# Altium PCB msp430最小系统.PcbDoc (part 3 of 3)
Units mm, origin at the board's own origin, x right, y up, seen from the top; angles counter-clockwise.
Board outline 152.4 x 101.6 mm, 2 copper layers (Top Layer, Bottom Layer); 67 components, 101 nets, 330 pads, 20 vias.
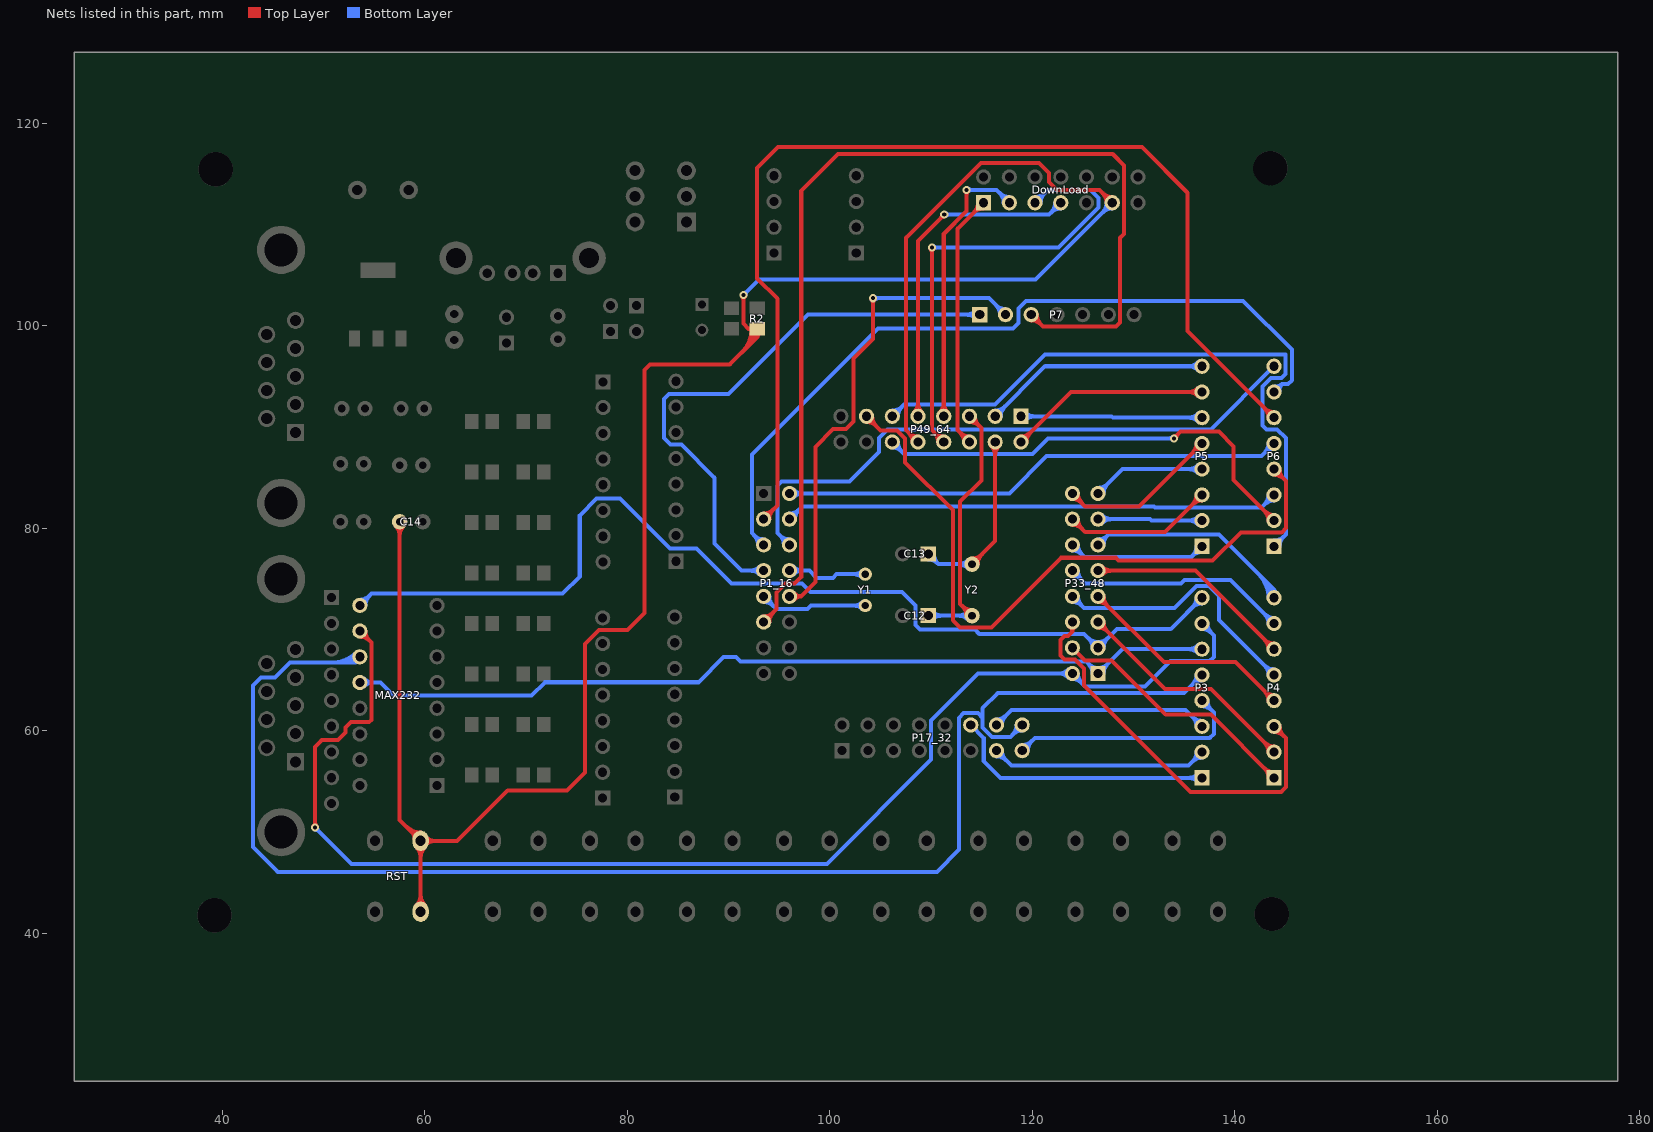
[diagram p3: the nets of this part, all layers, seen from the top]

## Via types
v1: diameter 0.8, hole 0.4, Top Layer to Bottom Layer, 20 vias

## Nets (pads, with @x,y where several pads share a name; then routed paths per layer and width w, separated by ;. In a path a pad name is that pad's centre, name@x,y a point inside that pad or via, vN(x,y) a via of type N, cw(c..) or ccw(c..) an arc to the next point about the centre after c; other vN are vias at no path point) (continued)
P3_0: P3.1 P17_32.12 | length 30.5
  Bottom Layer w0.4: P17_32.12@113.919,60.579 115.201,59.297 115.201,56.999 116.84,55.36 P3.1@136.755,55.36 ; 135.427,55.36 cw(c135.427,54.032) 136.366,54.971 ccw(c135.427,54.032) 135.427,55.36 ; 135.427,55.36 ccw(c135.427,56.688) 136.366,55.749 cw(c135.427,56.688) 135.427,55.36
P3_1: P3.2 P17_32.13 | length 29.8
  Bottom Layer w0.4: P17_32.13@116.459,58.039 117.932,56.566 135.421,56.566 P3.2@136.755,57.9 ; 117.398,57.1 cw(c118.337,58.039) 117.009,58.039 ccw(c118.337,58.039) 117.398,57.1 ; 117.398,57.1 ccw(c116.459,56.161) 116.459,57.489 cw(c116.459,56.161) 117.398,57.1 ; 135.816,56.961 cw(c136.755,56.022) 136.755,57.35 ccw(c136.755,56.022) 135.816,56.961 ; 135.816,56.961 ccw(c134.877,57.9) 136.205,57.9 cw(c134.877,57.9) 135.816,56.961
P3_2: P3.3 P17_32.14 | length 29.9
  Bottom Layer w0.4: P17_32.14@116.459,60.579 117.932,62.052 135.143,62.052 P3.3@136.755,60.44 ; 117.398,61.518 cw(c116.459,62.457) 116.459,61.129 ccw(c116.459,62.457) 117.398,61.518 ; 117.398,61.518 ccw(c118.337,60.579) 117.009,60.579 cw(c118.337,60.579) 117.398,61.518 ; 135.816,61.379 cw(c134.877,60.44) 136.205,60.44 ccw(c134.877,60.44) 135.816,61.379 ; 135.816,61.379 ccw(c136.755,62.318) 136.755,60.99 cw(c136.755,62.318) 135.816,61.379
P3_3: P3.4 P17_32.15 | length 31.7
  Bottom Layer w0.4: P17_32.15@118.999,58.039 120.244,59.284 137.516,59.284 137.922,59.69 137.922,61.813 P3.4@136.755,62.98 ; 119.938,58.978 cw(c118.999,59.917) 118.999,58.589 ccw(c118.999,59.917) 119.938,58.978 ; 119.938,58.978 ccw(c120.877,58.039) 119.549,58.039 cw(c120.877,58.039) 119.938,58.978 ; 137.694,62.041 cw(c138.633,62.98) 137.305,62.98 ccw(c138.633,62.98) 137.694,62.041 ; 137.694,62.041 ccw(c136.755,61.102) 136.755,62.43 cw(c136.755,61.102) 137.694,62.041
P3_4: MAX232.11 P3.5 P17_32.16 | length 165.8
  Bottom Layer w0.4: MAX232.11@53.594,67.31 53.01,66.726 ; P17_32.16@118.999,60.579 117.831,59.411 116.001,59.411 115.087,60.324 115.087,61.277 ; P3.5@136.755,65.52 134.964,63.729 116.586,63.729 115.087,62.23 115.087,61.277 ; 53.01,66.726 cw(c53.254,66.482) 53.385,66.801 ccw(c53.254,66.482) 53.01,66.726 ; 53.01,66.726 ccw(c52.766,66.97) 53.085,67.101 cw(c52.766,66.97) 53.01,66.726 ; 53.01,66.726 46.685,66.726 45.212,65.253 43.815,65.253 43.028,64.465 43.028,48.539 45.491,46.076 110.566,46.076 112.751,48.26 112.751,61.277 113.221,61.747 114.617,61.747 115.087,61.277 ; 118.06,59.64 cw(c118.999,58.701) 118.999,60.029 ccw(c118.999,58.701) 118.06,59.64 ; 118.06,59.64 ccw(c117.121,60.579) 118.449,60.579 cw(c117.121,60.579) 118.06,59.64 ; 135.816,64.581 cw(c136.755,63.642) 136.755,64.97 ccw(c136.755,63.642) 135.816,64.581 ; 135.816,64.581 ccw(c134.877,65.52) 136.205,65.52 cw(c134.877,65.52) 135.816,64.581 ; 50.856,66.726 ccw(c50.856,70.048) 53.205,67.699 cw(c50.856,70.048) 50.856,66.726 ; 51.821,66.726 ccw(c51.821,69.083) 53.488,67.416 cw(c51.821,69.083) 51.821,66.726 ; 52.787,66.726 ccw(c52.787,68.117) 53.771,67.133 cw(c52.787,68.117) 52.787,66.726
P3_5: MAX232.12 P3.6 P33_48.1 | length 103.6
  Bottom Layer w0.4: MAX232.12@53.594,64.77 55.651,64.77 56.921,63.5 70.561,63.5 71.857,64.795 87.046,64.795 89.526,67.275 90.754,67.275 91.202,66.827 125.324,66.827 P33_48.1@126.492,65.659 128.893,68.06 P3.6@136.755,68.06 ; 54.922,64.77 cw(c54.922,66.098) 53.983,65.159 ccw(c54.922,66.098) 54.922,64.77 ; 54.922,64.77 ccw(c54.922,63.442) 53.983,64.381 cw(c54.922,63.442) 54.922,64.77 ; 125.553,66.598 cw(c124.614,65.659) 125.942,65.659 ccw(c124.614,65.659) 125.553,66.598 ; 125.553,66.598 ccw(c126.492,67.537) P33_48.1@126.492,66.209 ; 125.553,66.598 ccw(c126.492,67.537) P33_48.1@126.492,66.209 ; P33_48.1@126.492,66.209 ccw(c126.492,67.537) 127.431,66.598 ; P33_48.1@126.492,66.209 ccw(c126.492,67.537) 127.431,66.598 ; 127.431,66.598 ccw(c128.37,65.659) 127.042,65.659 cw(c128.37,65.659) 127.431,66.598 ; 135.427,68.06 cw(c135.427,66.732) 136.366,67.671 ccw(c135.427,66.732) 135.427,68.06 ; 135.427,68.06 ccw(c135.427,69.388) 136.366,68.449 cw(c135.427,69.388) 135.427,68.06
P3_6: MAX232.10 P3.7 P33_48.2 | length 149.7
  Top Layer w0.4: v1(49.174,50.444) 49.174,58.42 49.835,59.08 51.435,59.08 52.197,59.842 52.197,60.35 52.705,60.858 54.515,60.858 54.744,61.087 54.744,68.7 MAX232.10@53.594,69.85 ; 49.174,50.927 cw(c48.692,50.927) 49.033,50.586 ccw(c48.692,50.927) 49.174,50.927 ; 49.174,50.927 ccw(c49.657,50.927) 49.316,50.586 cw(c49.657,50.927) 49.174,50.927 ; 54.533,68.911 cw(c55.472,69.85) 54.144,69.85 ccw(c55.472,69.85) 54.533,68.911 ; 54.533,68.911 ccw(c53.594,67.972) 53.594,69.3 cw(c53.594,67.972) 54.533,68.911
  Bottom Layer w0.4: v1(49.174,50.444) 52.756,46.863 99.72,46.863 110.007,57.15 110.007,61.036 114.63,65.659 P33_48.2@123.952,65.659 125.222,64.389 131.115,64.389 133.629,66.904 137.516,66.904 137.922,67.31 137.922,69.433 P3.7@136.755,70.6 ; 49.516,50.103 cw(c49.857,50.444) 49.374,50.444 ccw(c49.857,50.444) 49.516,50.103 ; 49.516,50.103 ccw(c49.174,49.762) 49.174,50.244 cw(c49.174,49.762) 49.516,50.103 ; 122.624,65.659 cw(c122.624,64.331) 123.563,65.27 ccw(c122.624,64.331) 122.624,65.659 ; 122.624,65.659 ccw(c122.624,66.987) 123.563,66.048 cw(c122.624,66.987) 122.624,65.659 ; 124.891,64.72 cw(c125.83,65.659) 124.502,65.659 ccw(c125.83,65.659) 124.891,64.72 ; 124.891,64.72 ccw(c123.952,63.781) 123.952,65.109 cw(c123.952,63.781) 124.891,64.72 ; 137.694,69.661 cw(c138.633,70.6) 137.305,70.6 ccw(c138.633,70.6) 137.694,69.661 ; 137.694,69.661 ccw(c136.755,68.722) 136.755,70.05 cw(c136.755,68.722) 137.694,69.661
P3_7: MAX232.9 P3.8 P33_48.3 | length 117
  Bottom Layer w0.4: MAX232.9@53.594,72.39 54.762,73.558 73.609,73.558 75.311,75.26 75.311,81.28 76.962,82.931 79.273,82.931 84.201,78.003 86.843,78.003 90.297,74.549 97.257,74.549 98.095,73.711 107.137,73.711 108.458,72.39 108.458,70.447 108.902,70.002 114.325,70.002 114.757,69.571 125.12,69.571 P33_48.3@126.492,68.199 128.346,70.053 133.668,70.053 P3.8@136.755,73.14 ; 54.533,73.329 cw(c53.594,74.268) 53.594,72.94 ccw(c53.594,74.268) 54.533,73.329 ; 54.533,73.329 ccw(c55.472,72.39) 54.144,72.39 cw(c55.472,72.39) 54.533,73.329 ; 125.553,69.138 cw(c124.614,68.199) 125.942,68.199 ccw(c124.614,68.199) 125.553,69.138 ; 125.553,69.138 ccw(c126.492,70.077) P33_48.3@126.492,68.749 ; 125.553,69.138 ccw(c126.492,70.077) P33_48.3@126.492,68.749 ; P33_48.3@126.492,68.749 ccw(c126.492,70.077) 127.431,69.138 ; P33_48.3@126.492,68.749 ccw(c126.492,70.077) 127.431,69.138 ; 127.431,69.138 ccw(c128.37,68.199) 127.042,68.199 cw(c128.37,68.199) 127.431,69.138 ; 135.816,72.201 cw(c136.755,71.262) 136.755,72.59 ccw(c136.755,71.262) 135.816,72.201 ; 135.816,72.201 ccw(c134.877,73.14) 136.205,73.14 cw(c134.877,73.14) 135.816,72.201
P4_0: P4.1 P33_48.4 | length 29.4
  Top Layer w0.4: P33_48.4@123.952,68.199 125.222,66.929 127.838,66.929 133.172,61.595 137.632,61.595 P4.1@143.867,55.36 ; 142.928,56.299 cw(c141.989,55.36) 143.317,55.36 ccw(c141.989,55.36) 142.928,56.299 ; 142.928,56.299 ccw(c143.867,57.238) 143.867,55.91 cw(c143.867,57.238) 142.928,56.299
P4_1: P4.2 P33_48.5 | length 31
  Top Layer w0.4: P33_48.5@126.492,70.739 133.096,64.135 137.632,64.135 P4.2@143.867,57.9 ; 127.431,69.8 cw(c128.37,70.739) 127.042,70.739 ccw(c128.37,70.739) 127.431,69.8 ; 127.431,69.8 ccw(c126.492,68.861) 126.492,70.189 cw(c126.492,68.861) 127.431,69.8 ; 142.928,58.839 cw(c141.989,57.9) 143.317,57.9 ccw(c141.989,57.9) 142.928,58.839 ; 142.928,58.839 ccw(c143.867,59.778) 143.867,58.45 cw(c143.867,59.778) 142.928,58.839
P4_2: P4.3 P33_48.6 | length 45.8
  Top Layer w0.4: P33_48.6@123.952,70.739 123.952,69.812 ; P4.3@143.867,60.44 145.034,59.273 145.034,54.432 144.577,53.975 135.618,53.975 125.102,64.491 125.102,66.135 124.207,67.031 123.19,67.031 122.784,67.437 122.784,68.961 123.19,69.367 123.507,69.367 123.952,69.812 ; 123.952,69.812 cw(c124.458,69.812) 124.216,70.256 ccw(c124.458,69.812) 123.952,69.812 ; 123.952,69.812 ccw(c123.446,69.812) 123.688,70.256 cw(c123.446,69.812) 123.952,69.812 ; 144.806,59.501 cw(c145.745,60.44) 144.417,60.44 ccw(c145.745,60.44) 144.806,59.501 ; 144.806,59.501 ccw(c143.867,58.562) 143.867,59.89 cw(c143.867,58.562) 144.806,59.501
P4_3: P4.4 P33_48.7 | length 30
  Top Layer w0.4: P33_48.7@126.492,73.279 132.994,66.777 140.07,66.777 P4.4@143.867,62.98 ; 127.431,72.34 cw(c128.37,73.279) 127.042,73.279 ccw(c128.37,73.279) 127.431,72.34 ; 127.431,72.34 ccw(c126.492,71.401) 126.492,72.729 cw(c126.492,71.401) 127.431,72.34 ; 142.928,63.919 cw(c141.989,62.98) 143.317,62.98 ccw(c141.989,62.98) 142.928,63.919 ; 142.928,63.919 ccw(c143.867,64.858) 143.867,63.53 cw(c143.867,64.858) 142.928,63.919
P4_4: P4.5 P33_48.8 | length 34.7
  Bottom Layer w0.4: P33_48.8@123.952,73.279 125.12,72.111 134.028,72.111 136.207,74.29 137.444,74.29 138.43,73.304 138.43,70.957 P4.5@143.867,65.52 ; 124.891,72.34 cw(c125.83,73.279) 124.502,73.279 ccw(c125.83,73.279) 124.891,72.34 ; 124.891,72.34 ccw(c123.952,71.401) 123.952,72.729 cw(c123.952,71.401) 124.891,72.34 ; 142.928,66.459 cw(c141.989,65.52) 143.317,65.52 ccw(c141.989,65.52) 142.928,66.459 ; 142.928,66.459 ccw(c143.867,67.398) 143.867,66.07 cw(c143.867,67.398) 142.928,66.459
P4_5: P4.6 P33_48.9 | length 28.9
  Top Layer w0.4: P33_48.9@126.492,75.819 136.108,75.819 P4.6@143.867,68.06 ; 127.82,75.819 cw(c127.82,77.147) 126.881,76.208 ccw(c127.82,77.147) 127.82,75.819 ; 127.82,75.819 ccw(c127.82,74.491) 126.881,75.43 cw(c127.82,74.491) 127.82,75.819 ; 142.928,68.999 cw(c141.989,68.06) 143.317,68.06 ccw(c141.989,68.06) 142.928,68.999 ; 142.928,68.999 ccw(c143.867,69.938) 143.867,68.61 cw(c143.867,69.938) 142.928,68.999
P4_6: P4.7 P33_48.10 | length 30.7
  Bottom Layer w0.4: P33_48.10@123.952,75.819 125.222,74.549 134.664,74.549 135.005,74.89 139.577,74.89 P4.7@143.867,70.6 ; 124.891,74.88 cw(c125.83,75.819) 124.502,75.819 ccw(c125.83,75.819) 124.891,74.88 ; 124.891,74.88 ccw(c123.952,73.941) 123.952,75.269 cw(c123.952,73.941) 124.891,74.88 ; 142.928,71.539 cw(c141.989,70.6) 143.317,70.6 ccw(c141.989,70.6) 142.928,71.539 ; 142.928,71.539 ccw(c143.867,72.478) 143.867,71.15 cw(c143.867,72.478) 142.928,71.539
P4_7: P4.8 P33_48.11 | length 37.3
  Bottom Layer w0.4: P33_48.11@126.492,78.359 127.508,79.375 138.43,79.375 143.867,73.938 ; P4.8@143.867,73.14 143.867,73.938 ; 127.431,79.298 cw(c126.492,80.237) 126.492,78.909 ccw(c126.492,80.237) 127.431,79.298 ; 127.431,79.298 ccw(c128.37,78.359) 127.042,78.359 cw(c128.37,78.359) 127.431,79.298 ; 143.867,73.938 cw(c143.563,73.938) 143.671,73.654 ccw(c143.563,73.938) 143.867,73.938 ; 143.867,73.938 ccw(c144.171,73.938) 144.063,73.654 cw(c144.171,73.938) 143.867,73.938 ; 142.364,75.441 cw(c140.063,73.14) 143.317,73.14 ccw(c140.063,73.14) 142.364,75.441 ; 143.047,74.758 cw(c141.428,73.14) 143.717,73.14 ccw(c141.428,73.14) 143.047,74.758 ; 143.73,74.075 cw(c142.794,73.14) 144.117,73.14 ccw(c142.794,73.14) 143.73,74.075
P5_0: P5.1 P33_48.12 | length 22.1
  Bottom Layer w0.4: P33_48.12@123.952,78.359 125.171,77.14 135.675,77.14 P5.1@136.755,78.22 ; 124.891,77.42 cw(c125.83,78.359) 124.502,78.359 ccw(c125.83,78.359) 124.891,77.42 ; 124.891,77.42 ccw(c123.952,76.481) 123.952,77.809 cw(c123.952,76.481) 124.891,77.42 ; 135.816,77.281 cw(c136.755,76.342) 136.755,77.67 ccw(c136.755,76.342) 135.816,77.281 ; 135.816,77.281 ccw(c134.877,78.22) 136.205,78.22 cw(c134.877,78.22) 135.816,77.281
P5_1: P5.2 P33_48.13 | length 18.7
  Bottom Layer w0.4: P33_48.13@126.492,80.899 131.623,80.899 131.762,80.76 P5.2@136.755,80.76 ; 127.82,80.899 cw(c127.82,82.227) 126.881,81.288 ccw(c127.82,82.227) 127.82,80.899 ; 127.82,80.899 ccw(c127.82,79.571) 126.881,80.51 cw(c127.82,79.571) 127.82,80.899 ; 135.427,80.76 cw(c135.427,79.432) 136.366,80.371 ccw(c135.427,79.432) 135.427,80.76 ; 135.427,80.76 ccw(c135.427,82.088) 136.366,81.149 cw(c135.427,82.088) 135.427,80.76
P5_2: P5.3 P33_48.14 | length 23.2
  Top Layer w0.4: P33_48.14@123.952,80.899 125.222,79.629 133.084,79.629 P5.3@136.755,83.3 ; 124.891,79.96 cw(c125.83,80.899) 124.502,80.899 ccw(c125.83,80.899) 124.891,79.96 ; 124.891,79.96 ccw(c123.952,79.021) 123.952,80.349 cw(c123.952,79.021) 124.891,79.96 ; 135.816,82.361 cw(c136.755,81.422) 136.755,82.75 ccw(c136.755,81.422) 135.816,82.361 ; 135.816,82.361 ccw(c134.877,83.3) 136.205,83.3 cw(c134.877,83.3) 135.816,82.361
P5_3: P5.4 P33_48.15 | length 19.6
  Bottom Layer w0.4: P33_48.15@126.492,83.439 128.893,85.84 P5.4@136.755,85.84 ; 127.431,84.378 cw(c126.492,85.317) 126.492,83.989 ccw(c126.492,85.317) 127.431,84.378 ; 127.431,84.378 ccw(c128.37,83.439) 127.042,83.439 cw(c128.37,83.439) 127.431,84.378 ; 135.427,85.84 cw(c135.427,84.512) 136.366,85.451 ccw(c135.427,84.512) 135.427,85.84 ; 135.427,85.84 ccw(c135.427,87.168) 136.366,86.229 cw(c135.427,87.168) 135.427,85.84
P5_4: P5.5 P33_48.16 | length 24.2
  Top Layer w0.4: P33_48.16@123.952,83.439 125.222,82.169 130.544,82.169 P5.5@136.755,88.38 ; 124.891,82.5 cw(c125.83,83.439) 124.502,83.439 ccw(c125.83,83.439) 124.891,82.5 ; 124.891,82.5 ccw(c123.952,81.561) 123.952,82.889 cw(c123.952,81.561) 124.891,82.5 ; 135.816,87.441 cw(c136.755,86.502) 136.755,87.83 ccw(c136.755,86.502) 135.816,87.441 ; 135.816,87.441 ccw(c134.877,88.38) 136.205,88.38 cw(c134.877,88.38) 135.816,87.441
P5_5: P5.6 P49_64.1 | length 26.3
  Bottom Layer w0.4: P49_64.1@118.872,91.059 127.813,91.059 127.952,90.92 P5.6@136.755,90.92 ; 120.2,91.059 cw(c120.2,92.387) 119.261,91.448 ccw(c120.2,92.387) 120.2,91.059 ; 120.2,91.059 ccw(c120.2,89.731) 119.261,90.67 cw(c120.2,89.731) 120.2,91.059 ; 135.427,90.92 cw(c135.427,89.592) 136.366,90.531 ccw(c135.427,89.592) 135.427,90.92 ; 135.427,90.92 ccw(c135.427,92.248) 136.366,91.309 cw(c135.427,92.248) 135.427,90.92
P5_6: P5.7 P49_64.2 | length 28.3
  Top Layer w0.4: P49_64.2@118.872,88.519 123.813,93.46 P5.7@136.755,93.46 ; 119.811,89.458 cw(c118.872,90.397) 118.872,89.069 ccw(c118.872,90.397) 119.811,89.458 ; 119.811,89.458 ccw(c120.75,88.519) 119.422,88.519 cw(c120.75,88.519) 119.811,89.458 ; 135.427,93.46 cw(c135.427,92.132) 136.366,93.071 ccw(c135.427,92.132) 135.427,93.46 ; 135.427,93.46 ccw(c135.427,94.788) 136.366,93.849 cw(c135.427,94.788) 135.427,93.46
P5_7: P5.8 P49_64.3 | length 30.8
  Bottom Layer w0.4: P49_64.3@116.332,91.059 121.273,96 P5.8@136.755,96 ; 117.271,91.998 cw(c116.332,92.937) 116.332,91.609 ccw(c116.332,92.937) 117.271,91.998 ; 117.271,91.998 ccw(c118.21,91.059) 116.882,91.059 cw(c118.21,91.059) 117.271,91.998 ; 135.427,96 cw(c135.427,94.672) 136.366,95.611 ccw(c135.427,94.672) 135.427,96 ; 135.427,96 ccw(c135.427,97.328) 136.366,96.389 cw(c135.427,97.328) 135.427,96
P6_0: P6.1 P49_64.11 | length 72.2
  Bottom Layer w0.4: P49_64.11@106.172,91.059 107.322,92.209 116.314,92.209 121.26,97.155 144.992,97.155 145.017,97.13 145.017,95.25 144.617,94.85 143.587,94.85 142.717,93.98 142.717,90.17 143.123,89.764 144.17,89.764 145.034,88.9 145.034,79.387 P6.1@143.867,78.22 ; 107.111,91.998 cw(c106.172,92.937) 106.172,91.609 ccw(c106.172,92.937) 107.111,91.998 ; 107.111,91.998 ccw(c108.05,91.059) 106.722,91.059 cw(c108.05,91.059) 107.111,91.998 ; 144.806,79.159 cw(c143.867,80.098) 143.867,78.77 ccw(c143.867,80.098) 144.806,79.159 ; 144.806,79.159 ccw(c145.745,78.22) 144.417,78.22 cw(c145.745,78.22) 144.806,79.159
P6_1: P6.2 P49_64.12 | length 56.1
  Top Layer w0.4: v1(133.985,88.875) 134.645,89.535 138.43,89.535 139.878,88.087 139.878,84.749 P6.2@143.867,80.76 ; 134.326,89.216 cw(c133.985,89.557) 133.985,89.075 ccw(c133.985,89.557) 134.326,89.216 ; 134.326,89.216 ccw(c134.668,88.875) 134.185,88.875 cw(c134.668,88.875) 134.326,89.216 ; 142.928,81.699 cw(c141.989,80.76) 143.317,80.76 ccw(c141.989,80.76) 142.928,81.699 ; 142.928,81.699 ccw(c143.867,82.638) 143.867,81.31 cw(c143.867,82.638) 142.928,81.699
  Bottom Layer w0.4: P49_64.12@106.172,88.519 107.34,87.351 120.015,87.351 121.539,88.875 v1(133.985,88.875) ; 107.111,87.58 cw(c108.05,88.519) 106.722,88.519 ccw(c108.05,88.519) 107.111,87.58 ; 107.111,87.58 ccw(c106.172,86.641) 106.172,87.969 cw(c106.172,86.641) 107.111,87.58 ; 133.502,88.875 cw(c133.502,88.392) 133.844,88.733 ccw(c133.502,88.392) 133.502,88.875 ; 133.502,88.875 ccw(c133.502,89.357) 133.844,89.016 cw(c133.502,89.357) 133.502,88.875
P6_2: P6.4 P49_64.13 | length 76.7
  Top Layer w0.4: P49_64.13@103.632,91.059 105.022,89.669 106.648,89.669 107.442,88.875 107.442,86.512 112.166,81.788 112.166,70.917 112.878,70.206 115.951,70.206 122.834,77.089 128.245,77.089 128.524,76.81 137.795,76.81 140.589,79.604 144.628,79.604 145.034,80.01 145.034,84.673 P6.4@143.867,85.84 ; 104.571,90.12 cw(c105.51,91.059) 104.182,91.059 ccw(c105.51,91.059) 104.571,90.12 ; 104.571,90.12 ccw(c103.632,89.181) 103.632,90.509 cw(c103.632,89.181) 104.571,90.12 ; 144.806,84.901 cw(c145.745,85.84) 144.417,85.84 ccw(c145.745,85.84) 144.806,84.901 ; 144.806,84.901 ccw(c143.867,83.962) 143.867,85.29 cw(c143.867,83.962) 144.806,84.901
P6_3: P1_16.2 P6.5 | length 58.2
  Bottom Layer w0.4: P1_16.2@96.012,83.439 117.729,83.439 121.412,87.122 142.609,87.122 P6.5@143.867,88.38 ; 97.34,83.439 cw(c97.34,84.767) 96.401,83.828 ccw(c97.34,84.767) 97.34,83.439 ; 97.34,83.439 ccw(c97.34,82.111) 96.401,83.05 cw(c97.34,82.111) 97.34,83.439 ; 142.928,87.441 cw(c143.867,86.502) 143.867,87.83 ccw(c143.867,86.502) 142.928,87.441 ; 142.928,87.441 ccw(c141.989,88.38) 143.317,88.38 cw(c141.989,88.38) 142.928,87.441
P6_4: P1_16.3 P6.6 | length 115.4
  Top Layer w0.4: P1_16.3@93.472,80.899 94.818,82.245 94.818,102.667 92.812,104.673 92.812,115.57 94.869,117.627 130.81,117.627 135.306,113.132 135.306,99.481 P6.6@143.867,90.92 ; 94.411,81.838 cw(c93.472,82.777) 93.472,81.449 ccw(c93.472,82.777) 94.411,81.838 ; 94.411,81.838 ccw(c95.35,80.899) 94.022,80.899 cw(c95.35,80.899) 94.411,81.838 ; 142.928,91.859 cw(c141.989,90.92) 143.317,90.92 ccw(c141.989,90.92) 142.928,91.859 ; 142.928,91.859 ccw(c143.867,92.798) 143.867,91.47 cw(c143.867,92.798) 142.928,91.859
P6_5: P1_16.4 P6.3 | length 57.3
  Bottom Layer w0.4: P1_16.4@96.012,80.899 97.282,82.169 132.004,82.169 132.131,82.042 142.609,82.042 P6.3@143.867,83.3 ; 96.951,81.838 cw(c96.012,82.777) 96.012,81.449 ccw(c96.012,82.777) 96.951,81.838 ; 96.951,81.838 ccw(c97.89,80.899) 96.562,80.899 cw(c97.89,80.899) 96.951,81.838 ; 142.928,82.361 cw(c143.867,81.422) 143.867,82.75 ccw(c143.867,81.422) 142.928,82.361 ; 142.928,82.361 ccw(c141.989,83.3) 143.317,83.3 cw(c141.989,83.3) 142.928,82.361
P6_6: P1_16.5 P6.7 | length 84.5
  Bottom Layer w0.4: P1_16.5@93.472,78.359 92.304,79.527 92.304,87.3 104.75,99.746 118.11,99.746 118.618,100.254 118.618,101.702 119.38,102.464 140.818,102.464 145.617,97.664 145.617,94.615 145.252,94.25 144.657,94.25 ; P6.7@143.867,93.46 144.657,94.25 ; 92.533,79.298 cw(c91.594,78.359) 92.922,78.359 ccw(c91.594,78.359) 92.533,79.298 ; 92.533,79.298 ccw(c93.472,80.237) 93.472,78.909 cw(c93.472,80.237) 92.533,79.298 ; 144.657,94.25 cw(c144.049,94.858) 143.938,94.005 ccw(c144.049,94.858) 144.657,94.25 ; 144.657,94.25 ccw(c145.265,93.642) 144.412,93.531 cw(c145.265,93.642) 144.657,94.25
P6_7: P1_16.6 P6.8 | length 65.2
  Bottom Layer w0.4: P1_16.6@96.012,78.359 94.844,79.527 94.844,84.201 95.25,84.607 101.93,84.607 104.851,87.528 104.851,88.9 105.715,89.764 137.631,89.764 P6.8@143.867,96 ; 95.073,79.298 cw(c94.134,78.359) 95.462,78.359 ccw(c94.134,78.359) 95.073,79.298 ; 95.073,79.298 ccw(c96.012,80.237) 96.012,78.909 cw(c96.012,80.237) 95.073,79.298
RST/NM: C14.1 DownLoad.11 P49_64.10 R2.2 RST.2 | length 260.6
  Top Layer w0.4: C14.1@57.531,80.645 57.531,51.213 RST.2@59.603,49.141 RST.2@59.603,49.124 ; RST.2@59.603,42.141 RST.2@59.603,49.124 ; v1(91.465,103.022) 91.465,100.216 91.986,99.695 ; P49_64.10@108.712,88.519 107.544,89.687 107.544,108.687 114.935,116.078 120.65,116.078 121.659,115.069 121.659,114.205 122.453,113.411 126.619,113.411 DownLoad.11@127.889,112.141 ; 57.531,79.288 cw(c58.888,79.288) 57.928,80.248 ccw(c58.888,79.288) 57.531,79.288 ; 57.531,79.288 ccw(c56.174,79.288) 57.134,80.248 cw(c56.174,79.288) 57.531,79.288 ; 59.603,43.79 cw(c58.155,43.79) 59.179,42.765 ccw(c58.155,43.79) 59.603,43.79 ; 59.603,43.79 ccw(c61.052,43.79) 60.027,42.765 cw(c61.052,43.79) 59.603,43.79 ; 59.603,47.492 cw(c61.052,47.492) 60.027,48.517 ccw(c61.052,47.492) 59.603,47.492 ; 59.603,47.492 ccw(c58.155,47.492) 59.179,48.517 cw(c58.155,47.492) 59.603,47.492 ; RST.2@59.603,49.124 63.195,49.124 68.199,54.127 74.066,54.127 75.819,55.88 75.819,68.58 77.216,69.977 80.01,69.977 81.686,71.653 81.686,95.618 82.233,96.164 90.119,96.164 92.837,98.882 ; 91.465,102.54 cw(c91.948,102.54) 91.607,102.881 ccw(c91.948,102.54) 91.465,102.54 ; 91.465,102.54 ccw(c90.983,102.54) 91.324,102.881 cw(c90.983,102.54) 91.465,102.54 ; 91.986,99.695 cw(c91.986,99.294) 92.34,99.483 ccw(c91.986,99.294) 91.986,99.695 ; 91.986,99.695 ccw(c91.986,100.096) 92.34,99.907 cw(c91.986,100.096) 91.986,99.695 ; 91.986,99.695 R2.2@92.837,99.695 92.837,98.882 ; 92.837,98.882 cw(c93.346,98.882) 93.076,99.314 ccw(c93.346,98.882) 92.837,98.882 ; 92.837,98.882 ccw(c92.328,98.882) 92.598,99.314 cw(c92.328,98.882) 92.837,98.882 ; 107.773,89.458 cw(c106.834,88.519) 108.162,88.519 ccw(c106.834,88.519) 107.773,89.458 ; 107.773,89.458 ccw(c108.712,90.397) 108.712,89.069 cw(c108.712,90.397) 107.773,89.458 ; 126.95,113.08 cw(c126.011,112.141) 127.339,112.141 ccw(c126.011,112.141) 126.95,113.08 ; 126.95,113.08 ccw(c127.889,114.019) 127.889,112.691 cw(c127.889,114.019) 126.95,113.08 ; 58.237,50.507 ccw(c59.603,51.872) 59.603,49.941 cw(c59.603,51.872) 58.237,50.507 ; 58.72,50.024 cw(c58.038,49.341) 59.003,49.341 ccw(c58.038,49.341) 58.72,50.024 ; 58.92,49.824 ccw(c59.603,50.507) 59.603,49.541 cw(c59.603,50.507) 58.92,49.824 ; RST.2@60.027,48.717 cw(c61.01,47.735) 61.01,49.124 ccw(c61.01,47.735) RST.2@60.027,48.717 ; RST.2@60.027,49.565 ccw(c61.094,50.632) 61.094,49.124 cw(c61.094,50.632) RST.2@60.027,49.565 ; 91.323,97.369 ccw(c88.997,99.695) 92.287,99.695 cw(c88.997,99.695) 91.323,97.369 ; 92.006,98.051 ccw(c90.363,99.695) 92.687,99.695 cw(c90.363,99.695) 92.006,98.051 ; 92.689,98.734 ccw(c91.728,99.695) 93.087,99.695 cw(c91.728,99.695) 92.689,98.734
  Bottom Layer w0.4: v1(91.465,103.022) 93.015,104.572 120.32,104.572 DownLoad.11@127.889,112.141 ; 91.807,103.364 cw(c91.465,103.705) 91.465,103.222 ccw(c91.465,103.705) 91.807,103.364 ; 91.807,103.364 ccw(c92.148,103.022) 91.665,103.022 cw(c92.148,103.022) 91.807,103.364 ; 126.95,111.202 cw(c127.889,110.263) 127.889,111.591 ccw(c127.889,110.263) 126.95,111.202 ; 126.95,111.202 ccw(c126.011,112.141) 127.339,112.141 cw(c126.011,112.141) 126.95,111.202
TCK: DownLoad.7 P49_64.9 | length 44.4
  Top Layer w0.4: P49_64.9@108.712,91.059 108.712,108.382 v1(111.303,110.973) ; 108.712,92.387 cw(c107.384,92.387) 108.323,91.448 ccw(c107.384,92.387) 108.712,92.387 ; 108.712,92.387 ccw(c110.04,92.387) 109.101,91.448 cw(c110.04,92.387) 108.712,92.387 ; 110.961,110.631 cw(c111.303,110.29) 111.303,110.773 ccw(c111.303,110.29) 110.961,110.631 ; 110.961,110.631 ccw(c110.62,110.973) 111.103,110.973 cw(c110.62,110.973) 110.961,110.631
  Bottom Layer w0.4: v1(111.303,110.973) 121.641,110.973 DownLoad.7@122.809,112.141 ; 111.786,110.973 cw(c111.786,111.455) 111.444,111.114 ccw(c111.786,111.455) 111.786,110.973 ; 111.786,110.973 ccw(c111.786,110.49) 111.444,110.831 cw(c111.786,110.49) 111.786,110.973 ; 121.87,111.202 cw(c122.809,110.263) 122.809,111.591 ccw(c122.809,110.263) 121.87,111.202 ; 121.87,111.202 ccw(c120.931,112.141) 122.259,112.141 cw(c120.931,112.141) 121.87,111.202
TDI: DownLoad.3 P49_64.7 | length 39.4
  Top Layer w0.4: P49_64.7@111.252,91.059 111.252,109.068 113.513,111.328 v1(113.513,113.411) ; 111.252,92.387 cw(c109.924,92.387) 110.863,91.448 ccw(c109.924,92.387) 111.252,92.387 ; 111.252,92.387 ccw(c112.58,92.387) 111.641,91.448 cw(c112.58,92.387) 111.252,92.387 ; 113.513,112.928 cw(c113.995,112.928) 113.654,113.27 ccw(c113.995,112.928) 113.513,112.928 ; 113.513,112.928 ccw(c113.03,112.928) 113.371,113.27 cw(c113.03,112.928) 113.513,112.928
  Bottom Layer w0.4: v1(113.513,113.411) 116.459,113.411 DownLoad.3@117.729,112.141 ; 113.995,113.411 cw(c113.995,113.894) 113.654,113.552 ccw(c113.995,113.894) 113.995,113.411 ; 113.995,113.411 ccw(c113.995,112.928) 113.654,113.27 cw(c113.995,112.928) 113.995,113.411 ; 116.79,113.08 cw(c115.851,112.141) 117.179,112.141 ccw(c115.851,112.141) 116.79,113.08 ; 116.79,113.08 ccw(c117.729,114.019) 117.729,112.691 cw(c117.729,114.019) 116.79,113.08
TDO/I: DownLoad.1 P49_64.6 | length 33.5
  Top Layer w0.4: P49_64.6@113.792,88.519 112.624,89.687 112.624,109.576 DownLoad.1@115.189,112.141 ; 112.853,89.458 cw(c111.914,88.519) 113.242,88.519 ccw(c111.914,88.519) 112.853,89.458 ; 112.853,89.458 ccw(c113.792,90.397) 113.792,89.069 cw(c113.792,90.397) 112.853,89.458 ; 114.25,111.202 cw(c115.189,110.263) 115.189,111.591 ccw(c115.189,110.263) 114.25,111.202 ; 114.25,111.202 ccw(c113.311,112.141) 114.639,112.141 cw(c113.311,112.141) 114.25,111.202
TMS: DownLoad.5 P49_64.8 | length 57.2
  Top Layer w0.4: v1(110.084,107.721) 110.084,89.687 P49_64.8@111.252,88.519 ; 110.084,107.239 cw(c110.566,107.239) 110.225,107.58 ccw(c110.566,107.239) 110.084,107.239 ; 110.084,107.239 ccw(c109.601,107.239) 109.942,107.58 cw(c109.601,107.239) 110.084,107.239 ; 110.313,89.458 cw(c109.374,88.519) 110.702,88.519 ccw(c109.374,88.519) 110.313,89.458 ; 110.313,89.458 ccw(c111.252,90.397) 111.252,89.069 cw(c111.252,90.397) 110.313,89.458
  Bottom Layer w0.4: v1(110.084,107.721) 122.58,107.721 126.517,111.658 126.517,112.624 125.73,113.411 121.539,113.411 DownLoad.5@120.269,112.141 ; 110.566,107.721 cw(c110.566,108.204) 110.225,107.863 ccw(c110.566,108.204) 110.566,107.721 ; 110.566,107.721 ccw(c110.566,107.239) 110.225,107.58 cw(c110.566,107.239) 110.566,107.721 ; 121.208,113.08 cw(c120.269,114.019) 120.269,112.691 ccw(c120.269,114.019) 121.208,113.08 ; 121.208,113.08 ccw(c122.147,112.141) 120.819,112.141 cw(c122.147,112.141) 121.208,113.08
VEREF+: P1_16.10 P7.2 | length 58.5
  Top Layer w0.4: P1_16.10@96.012,73.279 97.155,73.279 ; v1(104.267,102.718) 104.267,98.679 102.362,96.774 102.362,90.551 101.6,89.789 100.33,89.789 98.577,88.036 98.577,74.701 97.155,73.279 ; 97.155,73.279 cw(c97.155,74.192) 96.442,73.622 ccw(c97.155,74.192) 97.155,73.279 ; 97.155,73.279 ccw(c97.155,72.366) 96.442,72.936 cw(c97.155,72.366) 97.155,73.279 ; 104.267,102.235 cw(c104.75,102.235) 104.408,102.576 ccw(c104.75,102.235) 104.267,102.235 ; 104.267,102.235 ccw(c103.784,102.235) 104.126,102.576 cw(c103.784,102.235) 104.267,102.235
  Bottom Layer w0.4: v1(104.267,102.718) 115.722,102.718 P7.2@117.348,101.092 ; 104.75,102.718 cw(c104.75,103.2) 104.408,102.859 ccw(c104.75,103.2) 104.75,102.718 ; 104.75,102.718 ccw(c104.75,102.235) 104.408,102.576 cw(c104.75,102.235) 104.75,102.718 ; 116.409,102.031 cw(c115.47,101.092) 116.798,101.092 ccw(c115.47,101.092) 116.409,102.031 ; 116.409,102.031 ccw(c117.348,102.97) 117.348,101.642 cw(c117.348,102.97) 116.409,102.031
VREF+: P1_16.7 P7.1 | length 65.9
  Bottom Layer w0.4: P1_16.7@93.472,75.819 91.288,75.819 88.621,78.486 88.621,84.988 85.344,88.265 84.277,88.265 83.642,88.9 83.642,92.748 84.138,93.243 90.018,93.243 97.866,101.092 P7.1@114.808,101.092 ; 92.144,75.819 cw(c92.144,74.491) 93.083,75.43 ccw(c92.144,74.491) 92.144,75.819 ; 92.144,75.819 ccw(c92.144,77.147) 93.083,76.208 cw(c92.144,77.147) 92.144,75.819 ; 113.48,101.092 cw(c113.48,99.764) 114.419,100.703 ccw(c113.48,99.764) 113.48,101.092 ; 113.48,101.092 ccw(c113.48,102.42) 114.419,101.481 cw(c113.48,102.42) 113.48,101.092
VREF-: P1_16.11 P7.3 | length 111.9
  Top Layer w0.4: P1_16.11@93.472,70.739 94.742,72.009 94.742,73.66 95.631,74.549 96.52,74.549 97.18,75.209 97.18,113.309 100.813,116.942 127.94,116.942 129.057,115.824 129.057,109.068 128.676,108.687 128.676,100.33 128.27,99.924 121.056,99.924 P7.3@119.888,101.092 ; 94.411,71.678 cw(c93.472,72.617) 93.472,71.289 ccw(c93.472,72.617) 94.411,71.678 ; 94.411,71.678 ccw(c95.35,70.739) 94.022,70.739 cw(c95.35,70.739) 94.411,71.678 ; 120.827,100.153 cw(c121.766,101.092) 120.438,101.092 ccw(c121.766,101.092) 120.827,100.153 ; 120.827,100.153 ccw(c119.888,99.214) 119.888,100.542 cw(c119.888,99.214) 120.827,100.153
XIN: P1_16.8 Y1.1 | length 15.5
  Bottom Layer w0.4: P1_16.8@96.012,75.819 97.994,75.819 98.707,75.107 100.307,75.107 100.664,75.464 Y1.1@103.505,75.464 ; 97.34,75.819 cw(c97.34,77.147) 96.401,76.208 ccw(c97.34,77.147) 97.34,75.819 ; 97.34,75.819 ccw(c97.34,74.491) 96.401,75.43 cw(c97.34,74.491) 97.34,75.819 ; 102.419,75.464 cw(c102.419,74.378) 103.187,75.146 ccw(c102.419,74.378) 102.419,75.464 ; 102.419,75.464 ccw(c102.419,76.55) 103.187,75.782 cw(c102.419,76.55) 102.419,75.464
XOUT: P1_16.9 Y1.2 | length 18.3
  Bottom Layer w0.4: P1_16.9@93.472,73.279 94.742,72.009 97.791,72.009 98.146,72.364 Y1.2@103.505,72.364 ; 94.411,72.34 cw(c95.35,73.279) 94.022,73.279 ccw(c95.35,73.279) 94.411,72.34 ; 94.411,72.34 ccw(c93.472,71.401) 93.472,72.729 cw(c93.472,71.401) 94.411,72.34 ; 102.419,72.364 cw(c102.419,71.278) 103.187,72.046 ccw(c102.419,71.278) 102.419,72.364 ; 102.419,72.364 ccw(c102.419,73.45) 103.187,72.682 cw(c102.419,73.45) 102.419,72.364
XT2IN: C12.1 P49_64.5 Y2.2 | length 42.7
  Top Layer w0.4: P49_64.5@113.792,91.059 114.96,89.891 114.96,84.734 112.878,82.652 112.878,72.542 Y2.2@114.046,71.374 ; 113.087,72.333 cw(c112.127,71.374) 113.484,71.374 ccw(c112.127,71.374) 113.087,72.333 ; 113.087,72.333 ccw(c114.046,73.293) 114.046,71.936 cw(c114.046,73.293) 113.087,72.333 ; 114.731,90.12 cw(c115.67,91.059) 114.342,91.059 ccw(c115.67,91.059) 114.731,90.12 ; 114.731,90.12 ccw(c113.792,89.181) 113.792,90.509 cw(c113.792,89.181) 114.731,90.12
  Bottom Layer w0.4: C12.1@109.728,71.374 Y2.2@114.046,71.374 ; 111.056,71.374 cw(c111.056,72.702) 110.117,71.763 ccw(c111.056,72.702) 111.056,71.374 ; 111.056,71.374 ccw(c111.056,70.046) 110.117,70.985 cw(c111.056,70.046) 111.056,71.374 ; 112.689,71.374 cw(c112.689,70.017) 113.649,70.977 ccw(c112.689,70.017) 112.689,71.374 ; 112.689,71.374 ccw(c112.689,72.731) 113.649,71.771 cw(c112.689,72.731) 112.689,71.374
XT2OUT: C13.1 P49_64.4 Y2.1 | length 34.6
  Top Layer w0.4: Y2.1@114.046,76.454 116.332,78.74 P49_64.4@116.332,88.519 ; 115.005,77.413 cw(c114.046,78.373) 114.046,77.016 ccw(c114.046,78.373) 115.005,77.413 ; 115.005,77.413 ccw(c115.965,76.454) 114.608,76.454 cw(c115.965,76.454) 115.005,77.413 ; 116.332,87.191 cw(c117.66,87.191) 116.721,88.13 ccw(c117.66,87.191) 116.332,87.191 ; 116.332,87.191 ccw(c115.004,87.191) 115.943,88.13 cw(c115.004,87.191) 116.332,87.191
  Bottom Layer w0.4: C13.1@109.728,77.47 110.744,76.454 Y2.1@114.046,76.454 ; 110.667,76.531 cw(c111.606,77.47) 110.278,77.47 ccw(c111.606,77.47) 110.667,76.531 ; 110.667,76.531 ccw(c109.728,75.592) 109.728,76.92 cw(c109.728,75.592) 110.667,76.531 ; 112.689,76.454 cw(c112.689,75.097) 113.649,76.057 ccw(c112.689,75.097) 112.689,76.454 ; 112.689,76.454 ccw(c112.689,77.811) 113.649,76.851 cw(c112.689,77.811) 112.689,76.454
pads on no net: COM1.1 COM1.4 COM1.5 COM1.6 COM1.7 COM1.8 COM1.9 COM1.10 COM1.11 COM2.1 COM2.4 COM2.5 COM2.6 COM2.7 COM2.8 COM2.9 COM2.10 COM2.11 DownLoad.4 DownLoad.6 DownLoad.8 DownLoad.10 DownLoad.12 DownLoad.13 DownLoad.14 S1.2@85.852,115.316 S1.4 USB.2 USB.3 USB.5 USB.6

## Polygon pours and split planes (outlines as drawn)
no net on Top Layer (hatched 45Degree grid 0.508 track 0.203): 36.315,116.463 38.596,118.745 144.271,118.745 146.552,116.463 146.552,41.017 144.398,38.862 144.271,38.735 38.469,38.735 36.189,41.017 36.189,116.336
no net on Bottom Layer (hatched 45Degree grid 0.508 track 0.203): 39.769,38.735 38.499,38.735 36.213,41.019 36.213,116.27 36.721,116.778 38.626,118.681 144.29,118.681 146.576,116.397 146.576,41.019 144.29,38.735

## Silkscreen, mask and mechanical layers (free items; w line width, h text height)
Top Overlay:
  lines w0.254: 88.392,54.356 89.789,52.959 130.302,52.959 131.572,54.229 131.572,94.869 130.302,96.139 89.662,96.139 88.392,94.869 88.392,54.356
  text "+5V" at 96.012,111.76 h1.02
  text "GND" at 104.267,111.76 h1.02
  text "SN:091112" at 137.795,110.617 h1.02
  text "GND" at 104.267,109.347 h1.02
  text "+5V" at 96.139,109.22 h1.02
  text "+5V" at 96.139,106.68 h1.02
  text "GND" at 104.267,106.68 h1.02
  text "GND" at 49.752,106.507 h1.02
  text "+5V" at 58.357,106.491 h1.02
  text "VREF+" at 115.316,102.743 h1.02 r90
  text "VEREF+" at 117.856,102.743 h1.02 r90
  text "VREF-" at 120.396,102.743 h1.02 r90
  text "AVCC" at 122.936,102.743 h1.02 r90
  text "AVCC" at 125.222,102.743 h1.02 r90
  text "AVSS" at 127.889,102.743 h1.02 r90
  text "AVSS" at 130.302,102.743 h1.02 r90
  text "P57" at 132.334,95.504 h1.02
  text "P67" at 139.192,95.504 h1.02
  text "P17" at 80.264,94.107 h1.02
  text "L0" at 74.041,93.98 h1.02
  text "P56" at 132.334,93.091 h1.02
  text "P66" at 139.192,93.091 h1.02
  text "DVS" at 101.6,92.71 h1.02 r90
  text "P62" at 104.14,92.71 h1.02 r90
  text "P60" at 106.68,92.71 h1.02 r90
  text "TCK" at 109.093,92.71 h1.02 r90
  text "TDI" at 111.633,92.71 h1.02 r90
  text "2IN" at 114.046,92.71 h1.02 r90
  text "P57" at 116.713,92.71 h1.02 r90
  text "P55" at 119.253,92.71 h1.02 r90
  text "P16" at 80.264,91.694 h1.02
  text "L1" at 74.041,91.44 h1.02
  text "P55" at 132.461,90.551 h1.02
  text "P65" at 139.319,90.551 h1.02
  text "P15" at 80.391,89.154 h1.02
  text "L2" at 74.041,88.9 h1.02
  text "P54" at 132.334,87.884 h1.02
  text "P64" at 139.192,87.884 h1.02
  text "L3" at 74.041,86.487 h1.02
  text "P14" at 80.264,86.487 h1.02
  text "P53" at 132.334,85.217 h1.02
  text "P63" at 139.192,85.217 h1.02
  text "AVC" at 101.473,84.328 h1.02 r90
  text "AVS" at 104.14,84.328 h1.02 r90
  text "P61" at 106.68,84.328 h1.02 r90
  text "RST" at 109.22,84.328 h1.02 r90
  text "TMS" at 111.887,84.201 h1.02 r90
  text "P56" at 119.38,84.201 h1.02 r90
  text "L4" at 74.041,83.82 h1.02
  text "P13" at 80.264,83.82 h1.02
  text "2OUT" at 116.84,83.439 h1.02 r90
  text "DVC" at 89.154,83.058 h0.92
  text "P54" at 119.761,83.058 h1.02
  text "P53" at 128.143,83.058 h1.02
  text "P63" at 97.663,82.931 h1.02
  text "P52" at 132.334,82.804 h1.02
  text "P62" at 139.192,82.804 h1.02
  text "TD0/I" at 114.427,82.55 h1.02 r90
  text "P12" at 80.264,81.407 h1.02
  text "L5" at 74.168,81.28 h1.02
  text "P64" at 89.027,80.518 h1.02
  text "P65" at 97.663,80.391 h1.02
  text "P52" at 119.761,80.391 h1.02
  text "P51" at 128.143,80.391 h1.02
  text "P51" at 132.461,80.264 h1.02
  text "P61" at 139.319,80.264 h1.02
  text "P11" at 80.391,78.867 h1.02
  text "L6" at 74.041,78.74 h1.02
  text "P66" at 89.027,77.978 h1.02
  text "P67" at 97.663,77.851 h1.02
  text "P50" at 119.761,77.851 h1.02
  text "P47" at 128.143,77.851 h1.02
  text "P50" at 132.334,77.597 h1.02
  text "P60" at 139.192,77.597 h1.02
  text "L7" at 74.041,76.2 h1.02
  text "P10" at 80.264,76.2 h1.02
  text "VR+" at 89.027,75.438 h1.02
  text "XIN" at 97.663,75.311 h1.02
  text "P46" at 119.761,75.311 h1.02
  text "P45" at 128.143,75.311 h1.02
  text "XOT" at 89.027,72.898 h1.02
  text "VE+" at 97.663,72.771 h1.02
  text "P44" at 119.761,72.771 h1.02
  text "P43" at 128.143,72.771 h1.02
  text "P37" at 132.334,72.771 h1.02
  text "P47" at 139.319,72.771 h1.02
  text "P27" at 80.137,70.866 h1.02
  text "S7" at 74.295,70.612 h1.02
  text "VR-" at 89.027,70.358 h1.02
  text "P10" at 97.663,70.358 h1.02
  text "P36" at 132.334,70.358 h1.02
  text "P46" at 139.319,70.358 h1.02
  text "P42" at 119.761,70.231 h1.02
  text "P41" at 128.143,70.231 h1.02
  text "P26" at 80.137,68.453 h1.02
  text "S6" at 74.295,68.199 h1.02
  text "P11" at 89.027,67.818 h1.02
  text "P12" at 97.663,67.818 h1.02
  text "P35" at 132.461,67.818 h1.02
  text "P45" at 139.446,67.818 h1.02
  text "P40" at 119.761,67.691 h1.02
  text "P37" at 128.143,67.691 h1.02
  text "P25" at 80.264,65.913 h1.02
  text "S5" at 74.295,65.532 h1.02
  text "P13" at 89.027,65.278 h1.02
  text "P14" at 97.663,65.278 h1.02
  text "P36" at 119.761,65.278 h1.02
  text "P35" at 128.143,65.151 h1.02
  text "P34" at 132.334,65.151 h1.02
  text "P44" at 139.319,65.151 h1.02
  text "P24" at 80.137,63.246 h1.02
  text "S4" at 74.295,62.992 h1.02
  text "P33" at 132.334,62.484 h1.02
  text "P43" at 139.319,62.484 h1.02
  text "P16" at 101.727,62.23 h1.02 r90
  text "P20" at 104.267,62.23 h1.02 r90
  text "P22" at 106.807,62.23 h1.02 r90
  text "P24" at 109.22,62.23 h1.02 r90
  text "P26" at 111.887,62.23 h1.02 r90
  text "P30" at 114.427,62.23 h1.02 r90
  text "P32" at 116.967,62.23 h1.02 r90
  text "P34" at 119.507,62.23 h1.02 r90
  text "P23" at 80.137,60.579 h1.02
  text "S3" at 74.295,60.452 h1.02
  text "P32" at 132.334,60.071 h1.02
  text "P42" at 139.319,60.071 h1.02
  text "P22" at 80.137,58.166 h1.02
  text "S2" at 74.295,57.912 h1.02
  text "P31" at 132.461,57.531 h1.02
  text "P41" at 139.446,57.531 h1.02
  text "P21" at 80.137,55.626 h1.02
  text "S1" at 74.295,55.372 h1.02
  text "P30" at 132.334,54.864 h1.02
  text "P40" at 139.319,54.864 h1.02
  text "PI5" at 101.6,53.721 h1.02 r90
  text "P17" at 104.267,53.721 h1.02 r90
  text "P21" at 106.807,53.721 h1.02 r90
  text "P23" at 109.22,53.721 h1.02 r90
  text "P25" at 111.887,53.721 h1.02 r90
  text "P27" at 114.427,53.721 h1.02 r90
  text "P31" at 117.094,53.721 h1.02 r90
  text "P33" at 119.507,53.721 h1.02 r90
  text "P20" at 80.137,52.959 h1.02
  text "S0" at 74.295,52.832 h1.02
Mechanical 1:
  lines w0.254: 29.847,117.855 30.353,119.38 ; 29.97,39.623 30.48,38.1 ; 30.099,119.38 30.607,119.38 ; 30.226,38.1 30.734,38.1 ; 30.403,87.272 30.353,119.38 ; 30.43,70.208 30.48,38.1 ; 30.863,117.857 30.353,119.38 ; 30.986,39.625 30.48,38.1 ; 35.559,121.666 35.561,122.174 ; 37.083,121.409 35.56,121.92 ; 37.085,122.425 35.56,121.92 ; 82.591,121.813 35.56,121.92 ; 100.67,121.773 147.701,121.666 ; 146.176,121.161 147.701,121.666 ; 146.178,122.177 147.701,121.666 ; 147.7,121.412 147.702,121.92
  lines w0.5: 35.56,40.64 35.56,116.84 38.1,119.38 144.78,119.38 147.32,116.84 147.32,40.64 144.78,38.1 38.1,38.1 35.56,40.64
  text "112.1413 (mm)" at 82.843,120.899 h1.52 r359.87
  text "81.2801 (mm)" at 29.489,87.016 h1.52 r270.09

## Text inside footprints (layer, text, board x,y; h text height)
COM1: Top Overlay "6" at 41.297,90.341 h1.02 r90; Top Overlay "9" at 41.297,98.651 h1.02 r90
COM2: Top Overlay "6" at 41.297,57.829 h1.02 r90; Top Overlay "9" at 41.297,66.139 h1.02 r90
DownLoad: Top Overlay "2" at 112.649,114.173 h1.02; Top Overlay "1" at 113.157,111.633 h1.02; Top Overlay "13" at 132.461,111.379 h1.02; Top Overlay "14" at 132.461,114.173 h1.02